# Altium PCB golgi_bot_raspberry.PcbDoc
Units mil, origin at the board's own origin, x right, y up, seen from the top; angles counter-clockwise.
Board outline 2215 x 1830 mil, 2 copper layers (Top Layer, Bottom Layer); 15 components, 12 nets, 49 pads, 0 vias.
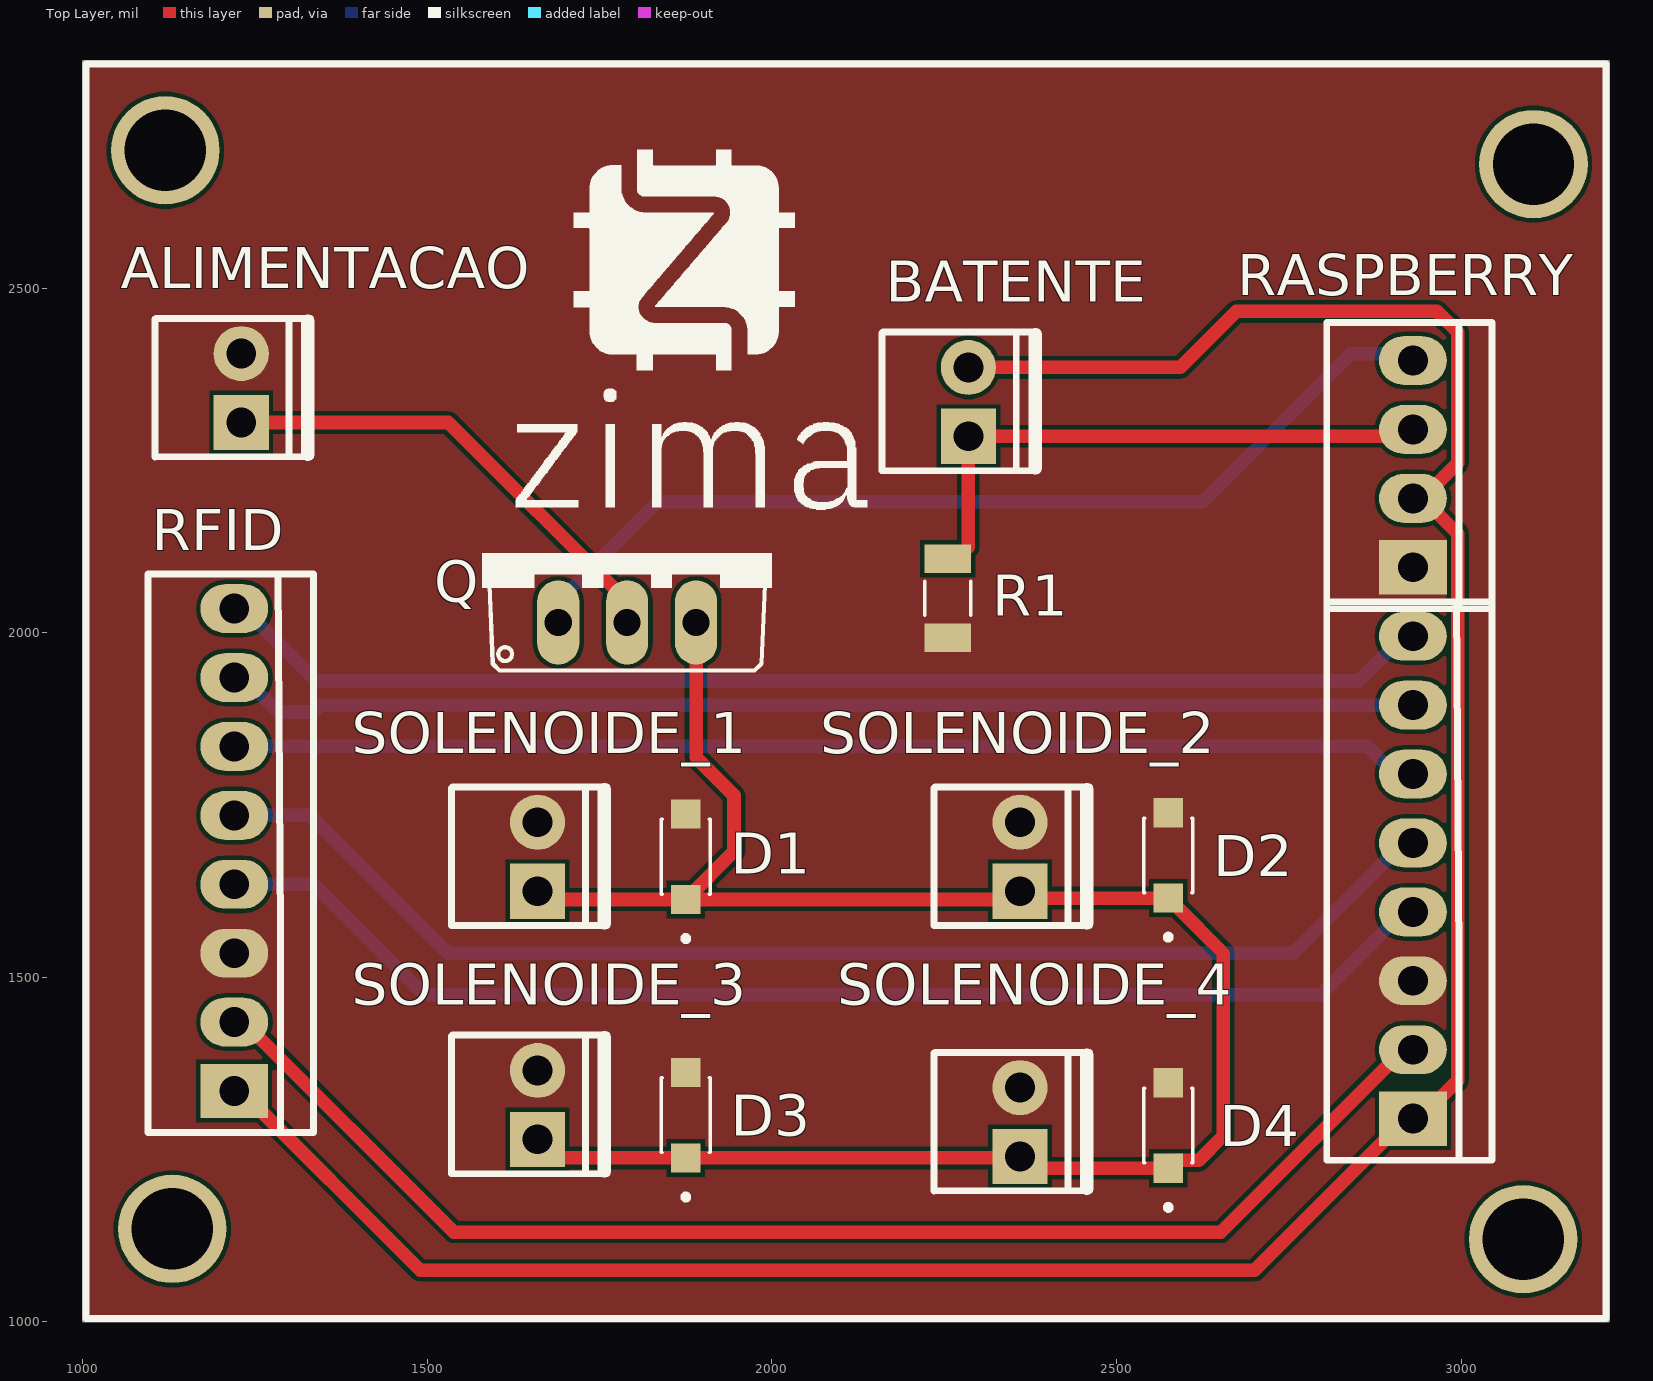
[diagram p0: Top Layer view]
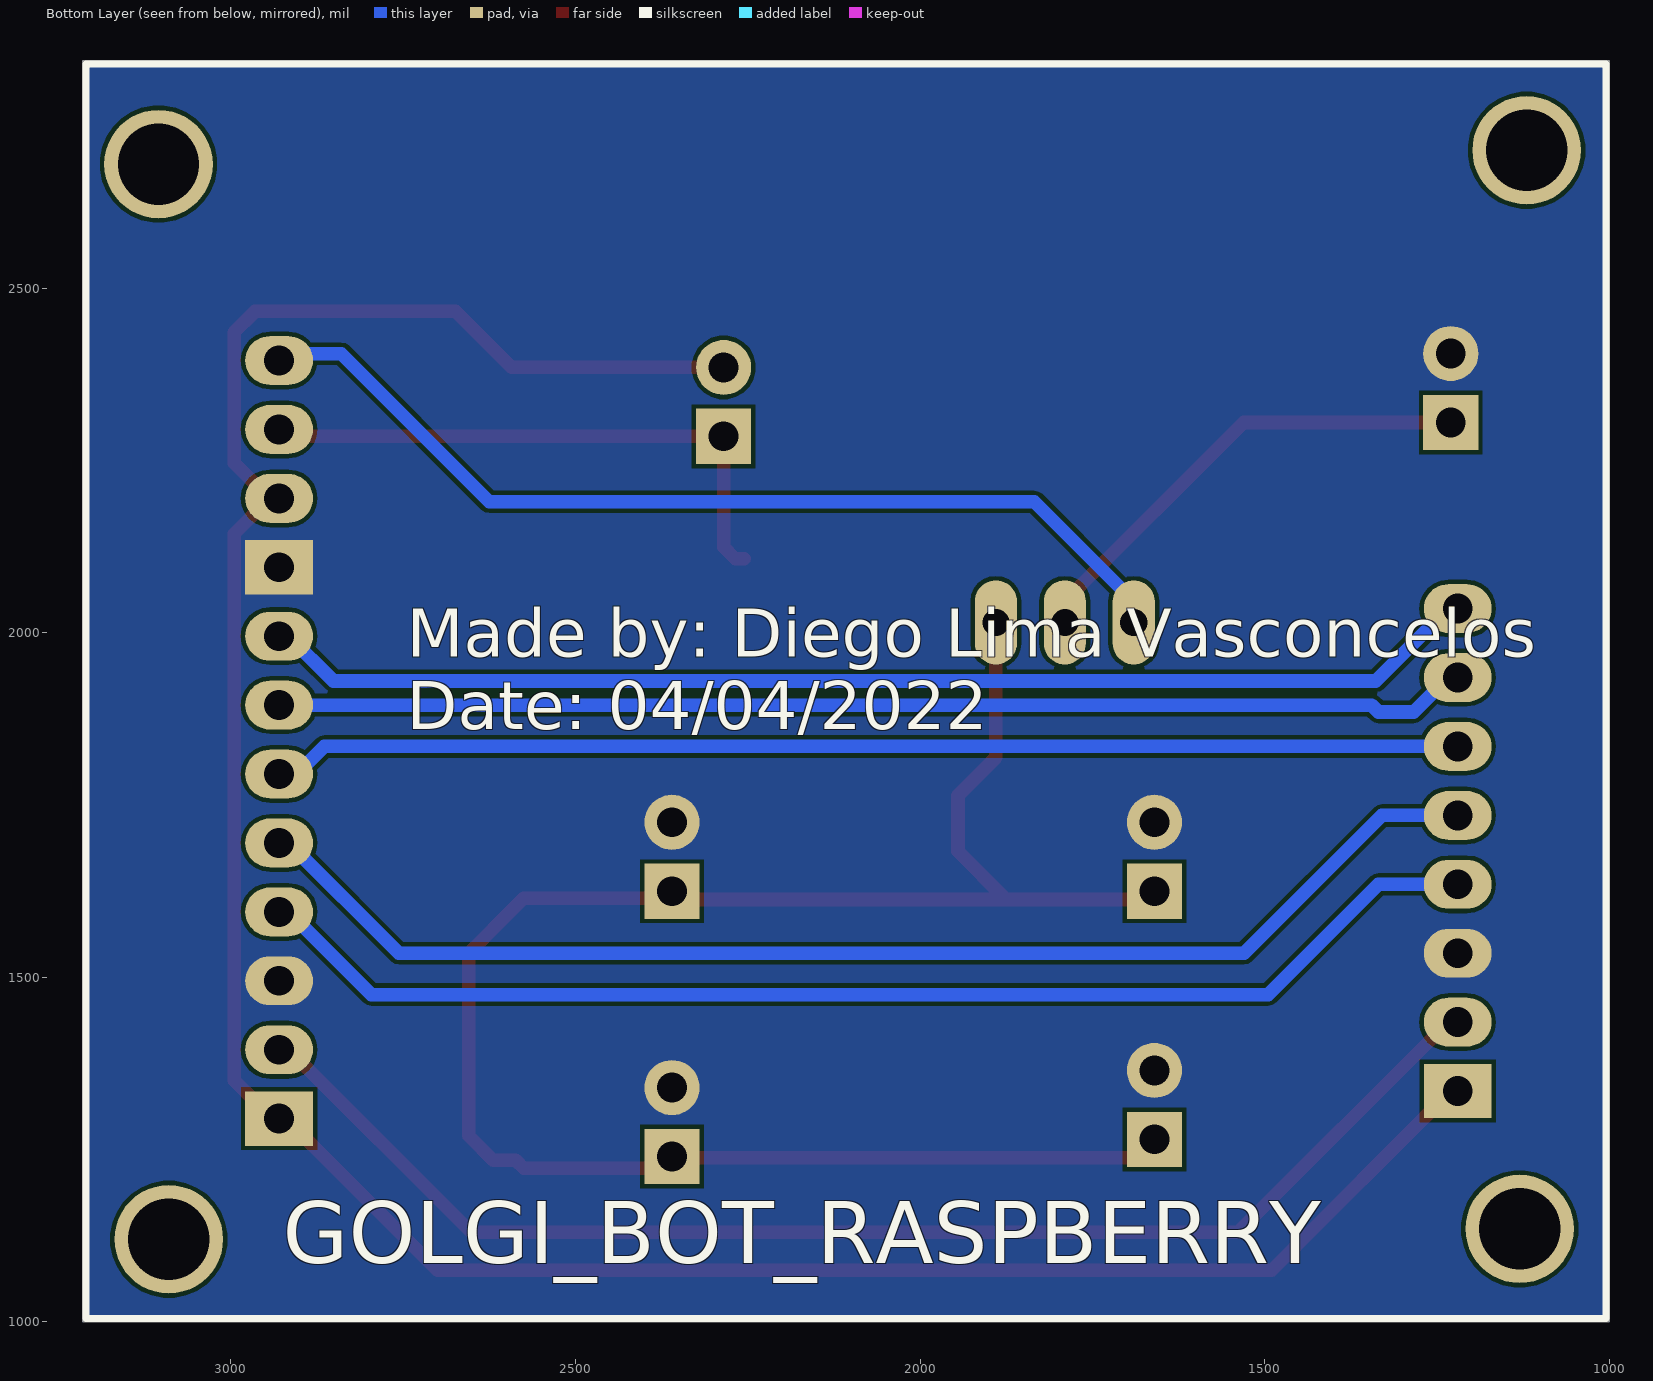
[diagram p1: Bottom Layer view, seen from below]
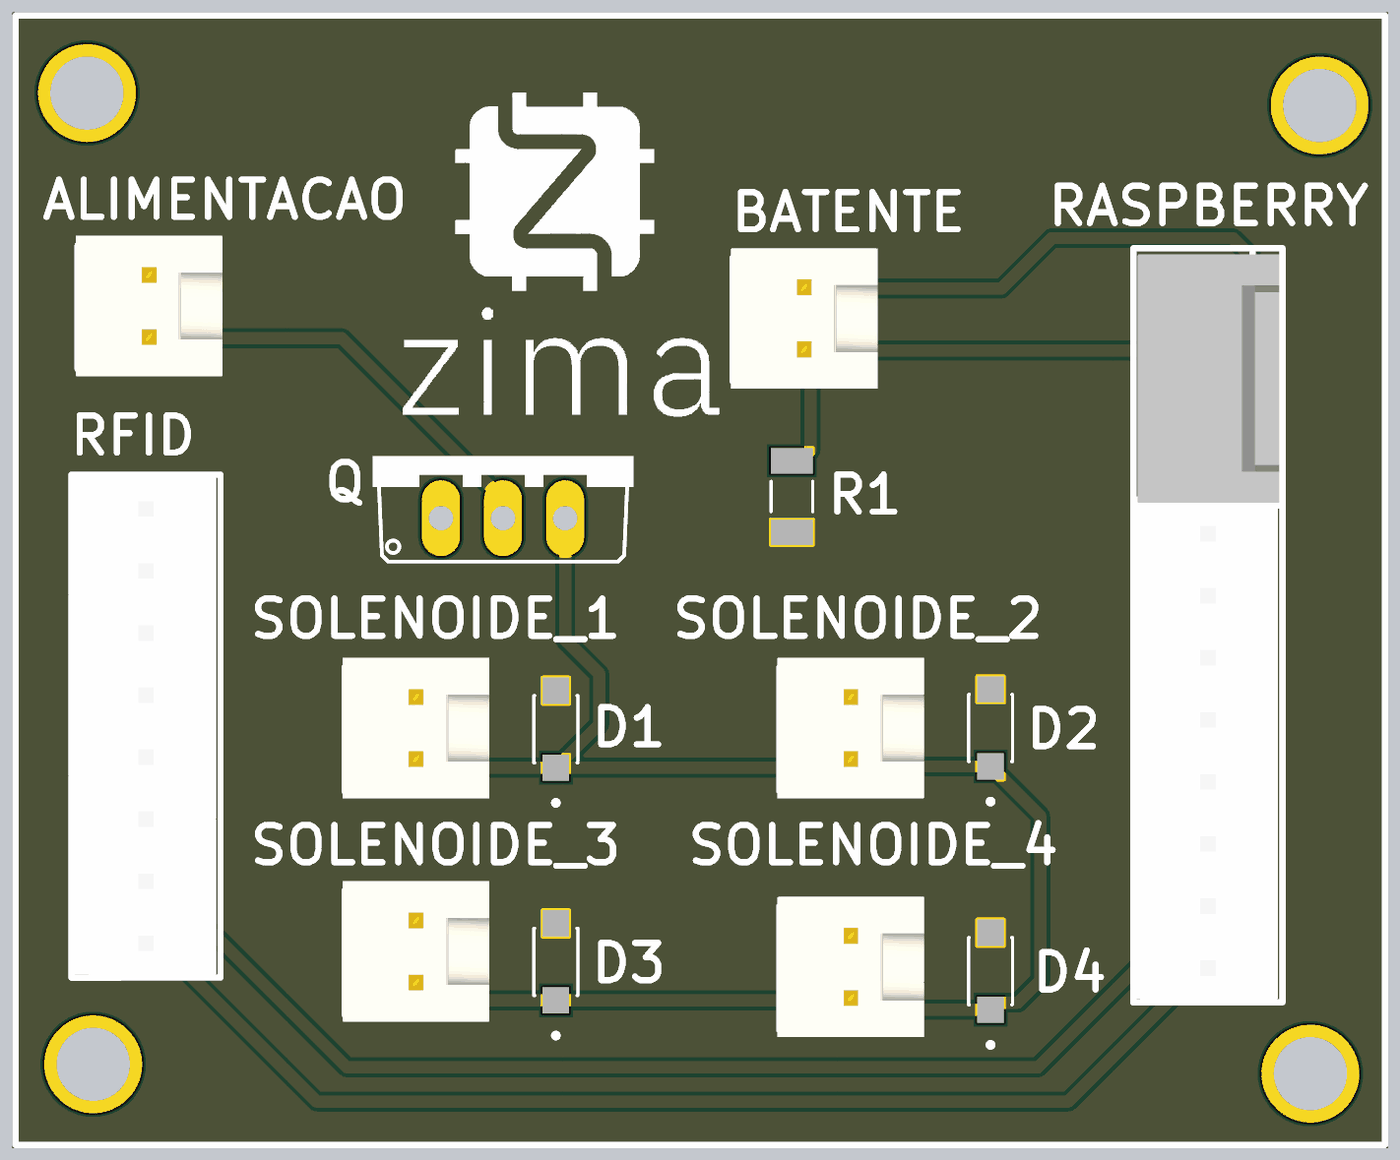
[diagram p2: 3D render of the assembled board from above, using the file's embedded part models]

## Layer stack, top to bottom
Top Solder: solder mask 0.4, Solder Resist, Dk 3.5
Top Layer: signal copper 1.4
Dielectric 1: dielectric 12.6, FR-4, Dk 4.8
Bottom Layer: signal copper 1.4
Bottom Solder: solder mask 0.4, Solder Resist, Dk 3.5

## Board outline
1000,1000 3215,1000 3215,2830 1000,2830

## Design rules (kind name [scope] priority, off if disabled: settings)
Clearance [All] p1: gap=5.98 ignorepadtopadclearanceinfootprint=FALSE except(0: Arc-Hole Track-Hole SMDPad-Hole THPad-Hole Via-Hole Fill-Hole Poly-Hole Region-Hole Text-Hole)
ComponentClearance [All] p1: gap=3.94 collisioncheckmode=3 verticalgap=3.94 showdistances=FALSE
HoleSize [All] p1: absolutevalues=TRUE maxlimit=150 minlimit=1 maxpercent=80.000 minpercent=20.000
MinimumSolderMaskSliver [All] p1: minsoldermaskwidth=3.94
PolygonConnect [All] p1: connectstyle=Direct reliefconductorwidth=10 reliefentries=4 polygonreliefangle="90 Angle" airgapwidth=10
RoutingVias [All] p1: holewidth=15.75 width=31.5 viastyle="Through Hole" minholewidth=11.81 minwidth=23.62 maxholewidth=19.68 maxwidth=39.37
SilkToSilkClearance [All] p1: silktosilkclearance=0
SilkToSolderMaskClearance [IsPad] p1: minsilkscreentomaskgap=0 clearancetoexposedcopper=TRUE
SolderMaskExpansion [All] p1: expansion=3.15 istentingtop=FALSE
Width [All] p1: maxlimit=39.37 minlimit=11.81 preferedwidth=19.68
25 further rules are at their usual default settings.

## Classes and differential pairs
component class golgi_bot_raspberry: ALIMENTACAO BATENTE D1 D2 D3 D4 Q R1 RASPBERRY RFID SOLENOIDE_1 SOLENOIDE_2 SOLENOIDE_3 SOLENOIDE_4

## Components (designator, comment, footprint, x,y, rotation, side; value= is the part's Value field where it differs from the comment)
ALIMENTACAO "KK_2.54_2vias" KK_2VIAS_180º 1230,2305 r90 top
BATENTE "KK_2.54_2vias" KK_2VIAS_180º 2285,2285 r90 top
D1 "" SODFL3718X102N 1875,1675 r90 top
D2 "" SODFL3718X102N 2575,1677.01 r90 top
D3 "" SODFL3718X102N 1875,1300 r90 top
D4 "" SODFL3718X102N 2575,1285 r90 top
Q "TIP41" TRANSISTOR-TO220AV-BCE 1790,2115 r0 top
R1 "10 k" RESC3115X65N 2255,2050 r90 top
RASPBERRY "KK_2.54_4vias" KK_4vias_180° 2930,2095 r90 top
RFID "KK_2.54_8vias" KK_8vias_180° 1220,1335 r90 top
SOLENOIDE_1 "KK_2.54_2vias" KK_2VIAS_180º 1660,1625 r90 top
SOLENOIDE_2 "KK_2.54_2vias" KK_2VIAS_180º 2360,1625 r90 top
SOLENOIDE_3 "KK_2.54_2vias" KK_2VIAS_180º 1660,1265 r90 top
SOLENOIDE_4 "KK_2.54_2vias" KK_2VIAS_180º 2360,1240 r90 top
? "KK_2.54_8vias" KK_8vias_180° 2930,1295 r90 top

## Footprints (in the part's own frame and the unit in brackets; to place one, negate y for a bottom-side part, rotate by r counter-clockwise, add the part's x,y. Pads: shape width x height; smd on the part's side, far side on the other; paste and mask are expansions set on the pad)
KK_2VIAS_180º [mil]
  rect 80x80 hole 43.31: 1(0,0)
  round 80 hole 43.31: 2(100,0)
  silkscreen extent -50,-101 151,125, body extent -61,-108 165,128, height 464
KK_4vias_180° [mm]
  rect 2x2.5 hole 1.1: 1(0,0)
  oval 1.8x2.5 hole 1.1: 2(2.54,0) 3(5.08,0) 4(7.62,0)
  silkscreen extent -1.53,-2.92 9.02,3.18, body extent -1.4,-2.79 8.76,3.01, height 10.12
KK_8vias_180° [mm]
  rect 2x2.5 hole 1.1: 1(0,0)
  oval 1.8x2.5 hole 1.1: 2(2.54,0) 3(5.08,0) 4(7.62,0) 5(10.16,0) 6(12.7,0) 7(15.24,0) 8(17.78,0)
  silkscreen extent -1.53,-2.92 19.05,3.18, body extent -1.4,-2.74 18.92,3.1, height 10.1
RESC3115X65N [mm]
  rect 1.05x1.72 smd: 1(-1.46,0) 2(1.46,0)
  silkscreen extent -0.62,-0.85 0.62,0.85
SODFL3718X102N [mm]
  rect 1.08x1.09 smd: A(1.575,0) C(-1.575,0)
  silkscreen extent -3.11,-0.9 1.38,0.9
TRANSISTOR-TO220AV-BCE [mm]
  oval 1.55x3.1 hole 1: B(-2.54,-2.54) C(0,-2.54) E(2.54,-2.54)
  silkscreen extent -5.33,-4.32 5.33,0

## Part data
ALIMENTACAO BATENTE SOLENOIDE_1 SOLENOIDE_2 SOLENOIDE_3 SOLENOIDE_4: "Conector KK 2.54mm 2 vias", Descrição="Conector KK 3 vias com passo 2.54mm", Encapsulamento="PTH - 180º", Modelo="2 vias - 180º", Valor="KK 2 vias 180º"
D1 D2 D3 D4: library part SMF12A, "19.9V Clamp 10.1A Ipp Tvs Diode Surface Mount SOD-123F", Package="SOD-123F Littelfuse", Availability="In Stock", Check_prices=https://www.snapeda.com/parts/SMF12A/Littelfuse/view-part/?ref=eda, MF="Littelfuse Inc.", MP=SMF12A, Price=None, Purchase-URL=https://pricing.snapeda.com/search/part/SMF12A/?ref=eda, SnapEDA_Link=https://www.snapeda.com/parts/SMF12A/Littelfuse/view-part/?ref=snap
Q: "Bipolar Transistors - BJT 6A 40V 65W NPN", Package=None, Availability=Unavailable, MF="ON Semiconductor", MP=TIP41, Price=None, SnapEDA_Link=https://www.snapeda.com/parts/TIP41/ON%20Semiconductor/view-part/4725228/?ref=snap
R1: library part CRGCQ1206F10K, "Fixed Resistor CRGCQ 1206 10K 1%", Package="3115 TE Connectivity", Arrow_Electronics-Purchase-URL=https://snapeda.com/shop?store=Arrow+Electronics&id=3187322, Availability=Unavailable, DigiKey-Purchase-URL=https://snapeda.com/shop?store=DigiKey&id=3187322, MF="TE Connectivity", Mouser-Purchase-URL=https://snapeda.com/shop?store=Mouser&id=3187322, MP=CRGCQ1206F10K, Price=None, SnapEDA_Link=https://www.snapeda.com/parts/CRGCQ1206F10K/TE%20Connectivity/view-part/3187322/?ref=snap
RASPBERRY: "Conector KK 2.54mm 4 vias", Descrição="Conector KK 3 vias com passo 2.54mm", Encapsulamento="PTH - 180º", Modelo="3 vias - 180º", Valor="KK 4 vias 180º"
RFID ?: "Conector KK 2.54mm 8 vias", Descrição="Conector KK 3 vias com passo 2.54mm", Encapsulamento="PTH - 180º", Modelo="3 vias - 180º", Valor="KK 8 vias 180º"

## Free pads (board coordinates)
  round 157.48 hole 118.11: 1(1130,1135) 2(3090,1120) 3(3105,2680) 4(1120,2700)

## Nets (pads, with @x,y where several pads share a name; then routed paths per layer and width w, separated by ;. In a path a pad name is that pad's centre, name@x,y a point inside that pad or via, vN(x,y) a via of type N, cw(c..) or ccw(c..) an arc to the next point about the centre after c; other vN are vias at no path point)
+3V3: ?.1 BATENTE.2 RASPBERRY.2 RFID.1 | length 3908.9
  Top Layer w19.68: RFID.1 1229.84,1335 1489.84,1075 2700.16,1075 2920.16,1295 ?.1 2939.84,1295 2995.04,1350.2 2995.04,2143.74 RASPBERRY.2@2943.78,2195 ; BATENTE.2 2592.54,2385 2673.8,2466.26 2965.01,2466.26 2995.04,2436.23 2995.04,2246.26 RASPBERRY.2@2943.78,2195 ; RASPBERRY.2 RASPBERRY.2@2943.78,2195 ; RASPBERRY.2@2930,2215 RASPBERRY.2@2943.78,2215
+12: ALIMENTACAO.1 Q.C | length 698
  Top Layer w19.68: ALIMENTACAO.1 1530.51,2305 1790,2045.51 Q.C
base: Q.B RASPBERRY.4 | length 1423.4
  Bottom Layer w19.68: Q.B 1690,2045.51 1834.49,2190 2625,2190 2839.79,2404.79 2920.21,2404.79 RASPBERRY.4
batente: BATENTE.1 R1.2 RASPBERRY.3 | length 874.4
  Top Layer w19.68: R1.2 2268.19,2107.48 2285,2124.29 BATENTE.1 2872.37,2285 2872.58,2285.21 2920.21,2285.21 RASPBERRY.3 ; RASPBERRY.3@2902.37,2315 RASPBERRY.3@2930,2315
GND: ?.3 ALIMENTACAO.2 D1.A D2.A D3.A D4.A R1.1 RASPBERRY.1 RFID.3 SOLENOIDE_1.2 SOLENOIDE_2.2 SOLENOIDE_3.2 SOLENOIDE_4.2
IRQ: ?.4 RFID.4 | length 1826
  Bottom Layer w19.68: RFID.4 1335,1635 1495,1475 2796.22,1475 2916.22,1595 ?.4
MISO: ?.5 RFID.5 | length 1859.1
  Bottom Layer w19.68: RFID.5 1330,1735 1530,1535 2756.22,1535 2916.22,1695 ?.5
MOSI: ?.6 RFID.6 | length 1726.6
  Bottom Layer w19.68: RFID.6 2864.35,1835 2904.35,1795 ?.6
RST: ?.2 RFID.2 | length 1946.1
  Top Layer w19.68: RFID.2 1233.78,1435 1538.78,1130 2651.22,1130 2916.22,1395 ?.2
SCL: ?.7 RFID.7 | length 1734.9
  Bottom Layer w19.68: RFID.7 1233.78,1935 1283.78,1885 1335,1885 1345,1895 ?.7
SDA: ?.8 RFID.8 | length 1780.4
  Bottom Layer w19.68: RFID.8 1233.78,2035 1338.78,1930 2851.22,1930 2916.22,1995 ?.8
transistor: D1.C D2.C D3.C D4.C Q.E SOLENOIDE_1.1 SOLENOIDE_2.1 SOLENOIDE_3.1 SOLENOIDE_4.1 | length 2794.6
  Top Layer w19.68: SOLENOIDE_3.1 1687.01,1237.99 D3.C 2357.99,1237.99 SOLENOIDE_4.1 2377.01,1222.99 D4.C 2586.42,1234.41 2619.41,1234.41 2655,1270 2655,1535 2586.61,1603.39 2586.61,1603.58 2575.2,1615 D2.C 2370,1615 SOLENOIDE_2.1 2347.99,1612.99 D1.C@1875.2,1612.99 ; SOLENOIDE_1.1 1672.01,1612.99 D1.C D1.C@1875.2,1612.99 ; Q.E 1890,1818.98 1945,1763.98 1945,1682.8 D1.C@1875.2,1612.99

## Polygon pours and split planes (outlines as drawn)
GND on Top Layer "GND_L01_P001" (solid, pour order 1): 1000,2830 3215,2830 3215,1000 1000,1000
GND on Bottom Layer "GND_L02_P002" (solid, pour order 2): 1000,2830 3215,2830 3215,1000 1000,1000

## Silkscreen, mask and mechanical layers (free items; w line width, h text height)
Top Overlay:
  drawing of 11 lines, arcs and shapes, not listed
Bottom Overlay:
  lines w10: 1005,1005 1005,2825 3210,2825 3210,1005 1005,1005
  text "Made by: Diego Lima Vasconcelos / Date: 04/04/2022" at 2745,1860 h70
  text "GOLGI_BOT_RASPBERRY" at 2925,1085 h90